# Altium PCB PCB_ProgAdapter_v1.PcbDoc
Units mil, origin at the board's own origin, x right, y up, seen from the top; angles counter-clockwise.
Board outline 475 x 455 mil, 2 copper layers (Top Layer, Bottom Layer); 4 components, 6 nets, 16 pads, 0 vias.
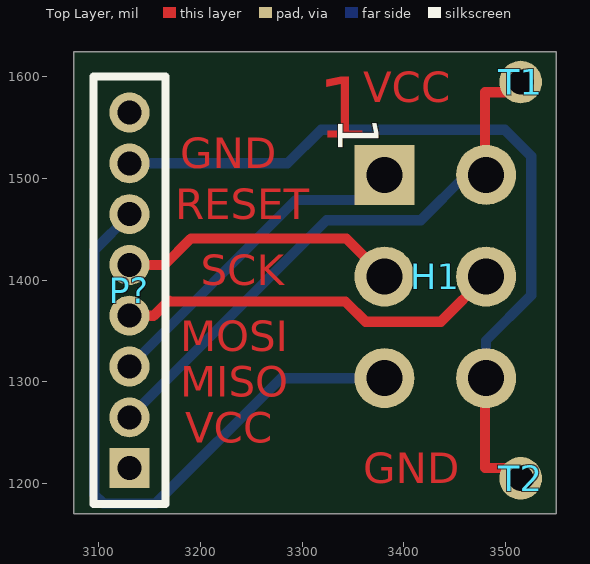
[diagram p0: Top Layer view]
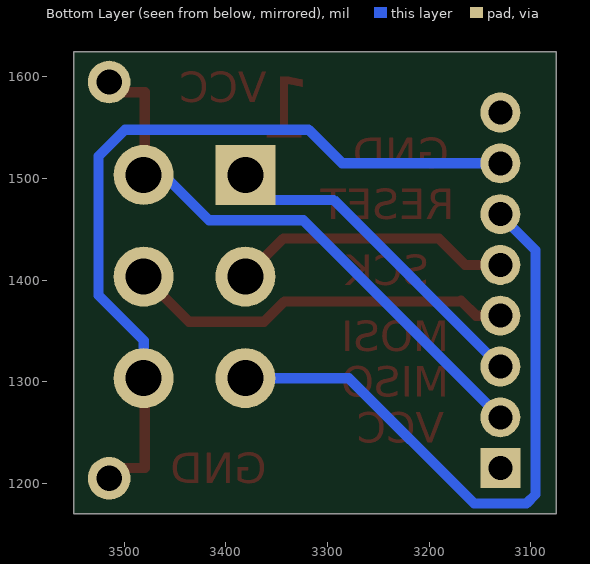
[diagram p1: Bottom Layer view, seen from below]

## Layer stack, top to bottom
Top Solder: solder mask 0.4, Solder Resist, Dk 3.5
Top Layer: signal copper 1.4
Dielectric1: dielectric 12.6, FR-4, Dk 4.8
Bottom Layer: signal copper 1.4
Bottom Solder: solder mask 0.4, Solder Resist, Dk 3.5

## Board outline
3075,1170 3075,1625 3550,1625 3550,1170

## Design rules (kind name [scope] priority, off if disabled: settings)
Clearance [All] p1: gap=6
PolygonConnect [All] p1: connectstyle=Relief reliefconductorwidth=10 reliefentries=4 polygonreliefangle="90 Angle" airgapwidth=10
RoutingVias [All] p1: holewidth=28 width=50 viastyle="Through Hole" minholewidth=28 minwidth=50 maxholewidth=28 maxwidth=50
SolderMaskExpansion [All] p1: expansion=4
Width [All] p1: maxlimit=10 minlimit=6 preferedwidth=6
30 further rules are at their usual default settings.

## Components (designator, comment, footprint, x,y, rotation, side; value= is the part's Value field where it differs from the comment)
H1 "3x2 ISP" "3x2 ISP" 3475,1305 r270 top
P? "MHDR1X8" MHDR1X8 3130,1215 r90 top
T1 "Test point small" "Test point small" 3515,1595 r0 top
T2 "Test point small" "Test point small" 3515,1205 r0 top

## Footprints (in the part's own frame and the unit in brackets; to place one, negate y for a bottom-side part, rotate by r counter-clockwise, add the part's x,y. Pads: shape width x height; smd on the part's side, far side on the other; paste and mask are expansions set on the pad)
"3x2 ISP" [mm] "ISP programmer atmel"
  rect 1.5x1.5 hole 0.9: 1(-5.042,-2.388)
  round 1.5 hole 0.9: 2(-5.042,0.152) 3(-2.502,-2.388) 4(-2.502,0.152) 5(0.038,-2.388) 6(0.038,0.152)
MHDR1X8 [mm] "Connector; Header; 8 Position"
  rect 1x1 hole 0.6: 1(0,0)
  round 1 hole 0.6: 2(1.27,0) 3(2.54,0) 4(3.81,0) 5(5.08,0) 6(6.35,0) 7(7.62,0) 8(8.89,0)
  silkscreen extent -0.9,-0.9 9.79,0.9
"Test point small" [mil]
  round 42 hole 25: 0(0,0)

## Part data
P?: "Header, 8-Pin"

## Nets (pads, with @x,y where several pads share a name; then routed paths per layer and width w, separated by ;. In a path a pad name is that pad's centre, name@x,y a point inside that pad or via, vN(x,y) a via of type N, cw(c..) or ccw(c..) an arc to the next point about the centre after c; other vN are vias at no path point)
GND: H1.6 P?.7 T2.0 | length 784.9
  Top Layer w10: H1.6 3480,1302.55 3480,1215 3505,1215 T2.0
  Bottom Layer w10: P?.7 3285.6,1515 3318.65,1548.05 3499.41,1548.05 3525.5,1521.96 3525.5,1385.08 3480.97,1340.55 H1.6
MISO: H1.1 P?.3 | length 329.1
  Bottom Layer w10: P?.3 3293.99,1478.99 3356.44,1478.99 H1.1
MOSI: H1.4 P?.4 | length 384.3
  Top Layer w10: P?.4 3153.8,1365 3168.79,1379.99 3169.78,1379 3342.52,1379 3362.52,1358.99 3436.44,1358.99 H1.4
RESET: H1.5 P?.6 | length 630.6
  Bottom Layer w10: P?.6 3130,1464.05 3095.31,1429.37 3095.31,1189.1 3104.1,1180.31 3155.9,1180.31 3279.1,1303.52 H1.5
SCK: H1.3 P?.5 | length 277.3
  Top Layer w10: P?.5 3164.45,1415 3190.44,1440.99 3343.5,1440.99 H1.3
VCC: H1.2 P?.2 T1.0 | length 570.8
  Top Layer w10: H1.2 3480,1504.49 3480,1585 3505,1585 T1.0
  Bottom Layer w10: P?.2 3323.99,1458.99 3416.71,1458.99 3461.24,1503.52 H1.2
pads on no net: P?.1 P?.8

## Other copper
Top Layer:
  text "VCC" at 3360,1575 h30
  text "1" at 3315,1540 h60
  text "GND" at 3180,1510 h30
  text "RESET" at 3175,1460 h30
  text "SCK" at 3200,1395 h30
  text "MOSI" at 3180,1330 h30
  text "MISO" at 3180,1285 h30
  text "VCC" at 3185,1240 h30
  text "GND" at 3360,1200 h30

## Silkscreen, mask and mechanical layers (free items; w line width, h text height)
Mechanical 1:
  the board outline again, w5
Mechanical 13:
  text "12.1mm x 12mm (0.48in x 0.48in)" at 2525,1710 h60

## Text inside footprints (layer, text, board x,y; h text height)
H1: Top Overlay "1" at 3335.39,1560.12 h40 r270